# Altium PCB 题目一PCB.PcbDoc
Units mm, origin at the board's own origin, x right, y up, seen from the top; angles counter-clockwise.
Board outline 40 x 40 mm, 2 copper layers (Top Layer, Bottom Layer); 44 components, 8 nets, 104 pads, 0 vias.
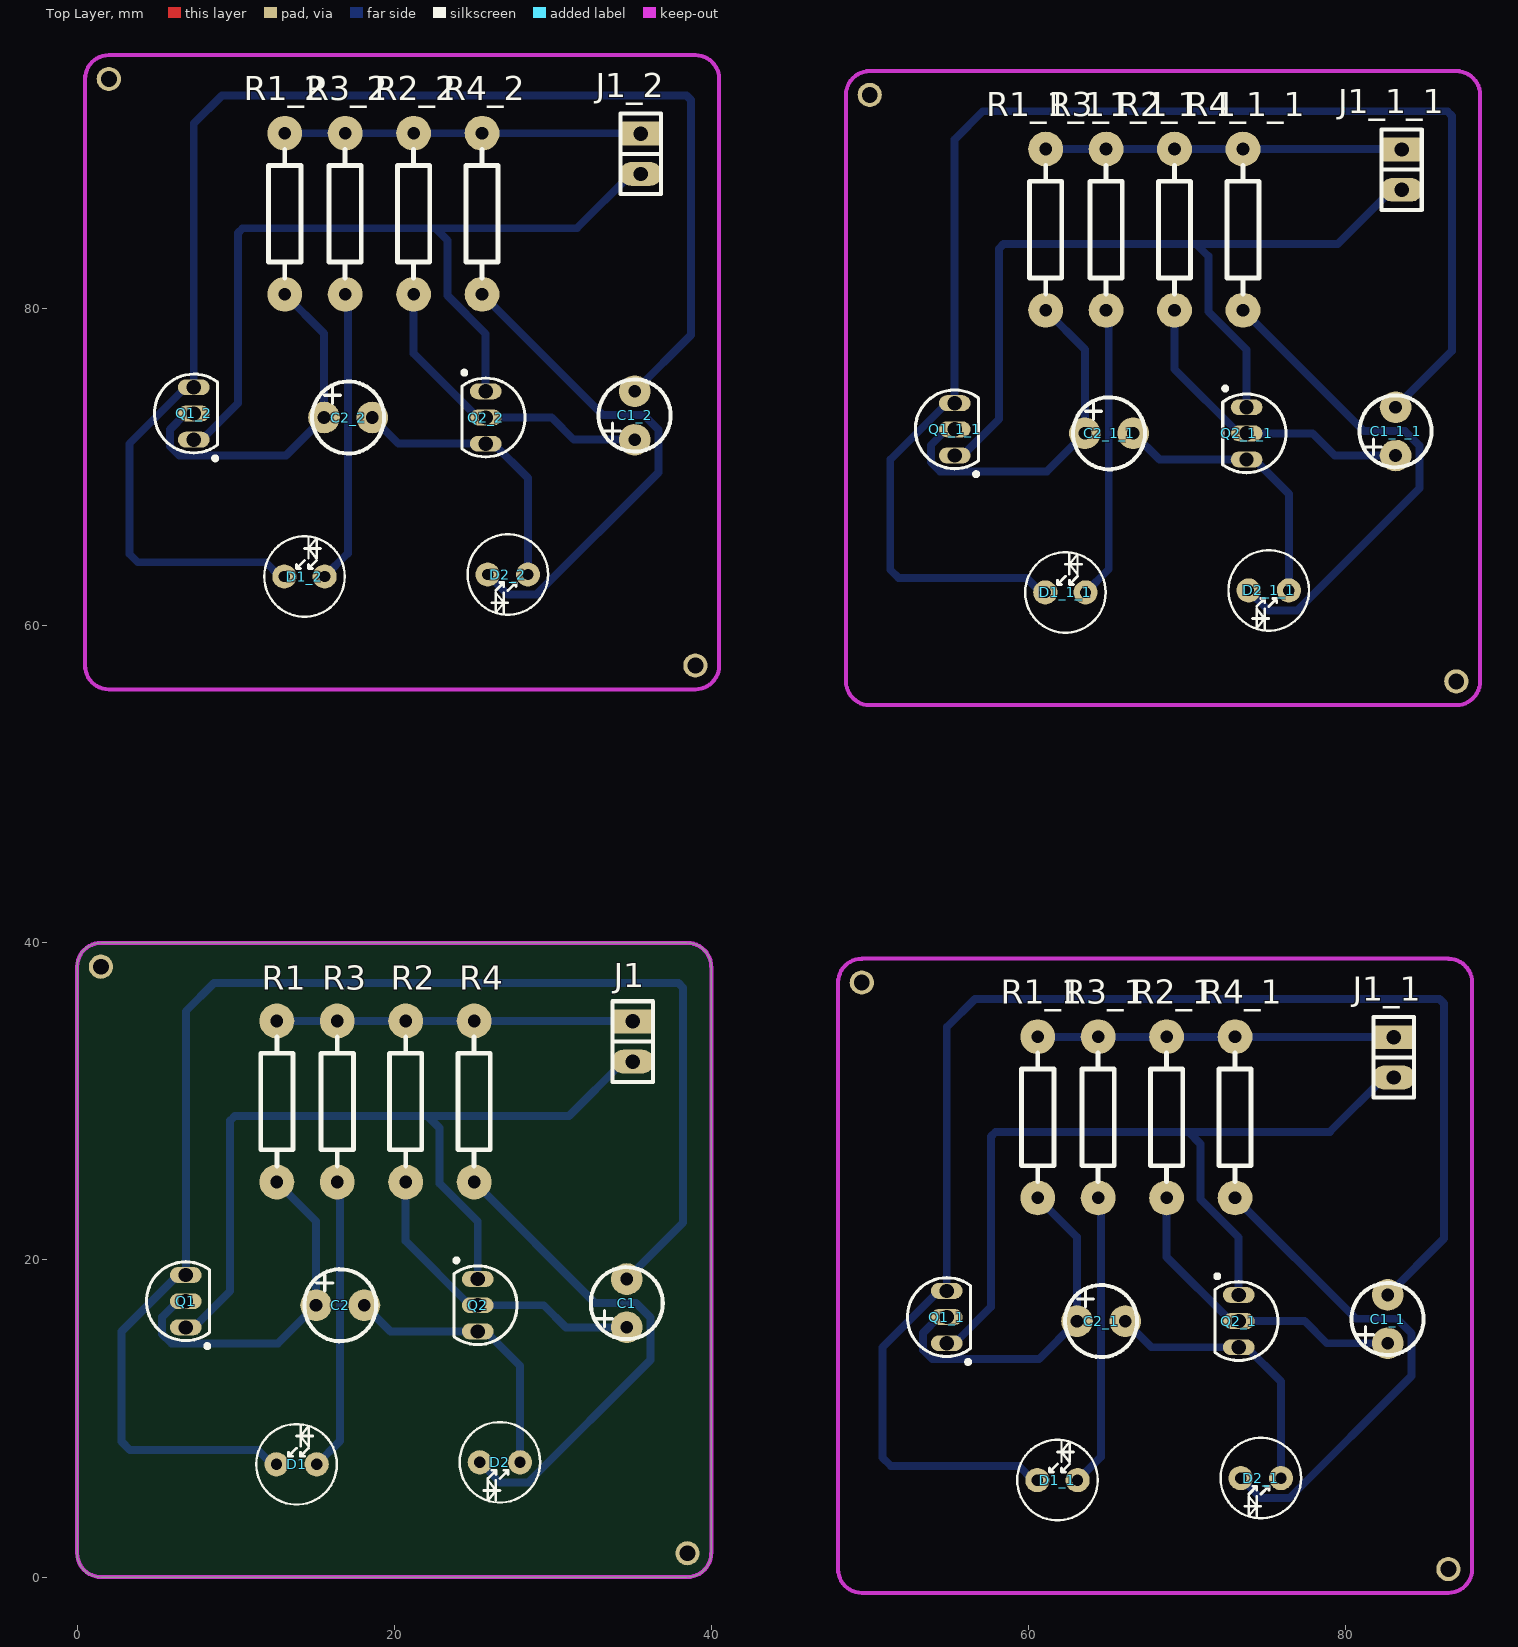
[diagram p0: Top Layer view]
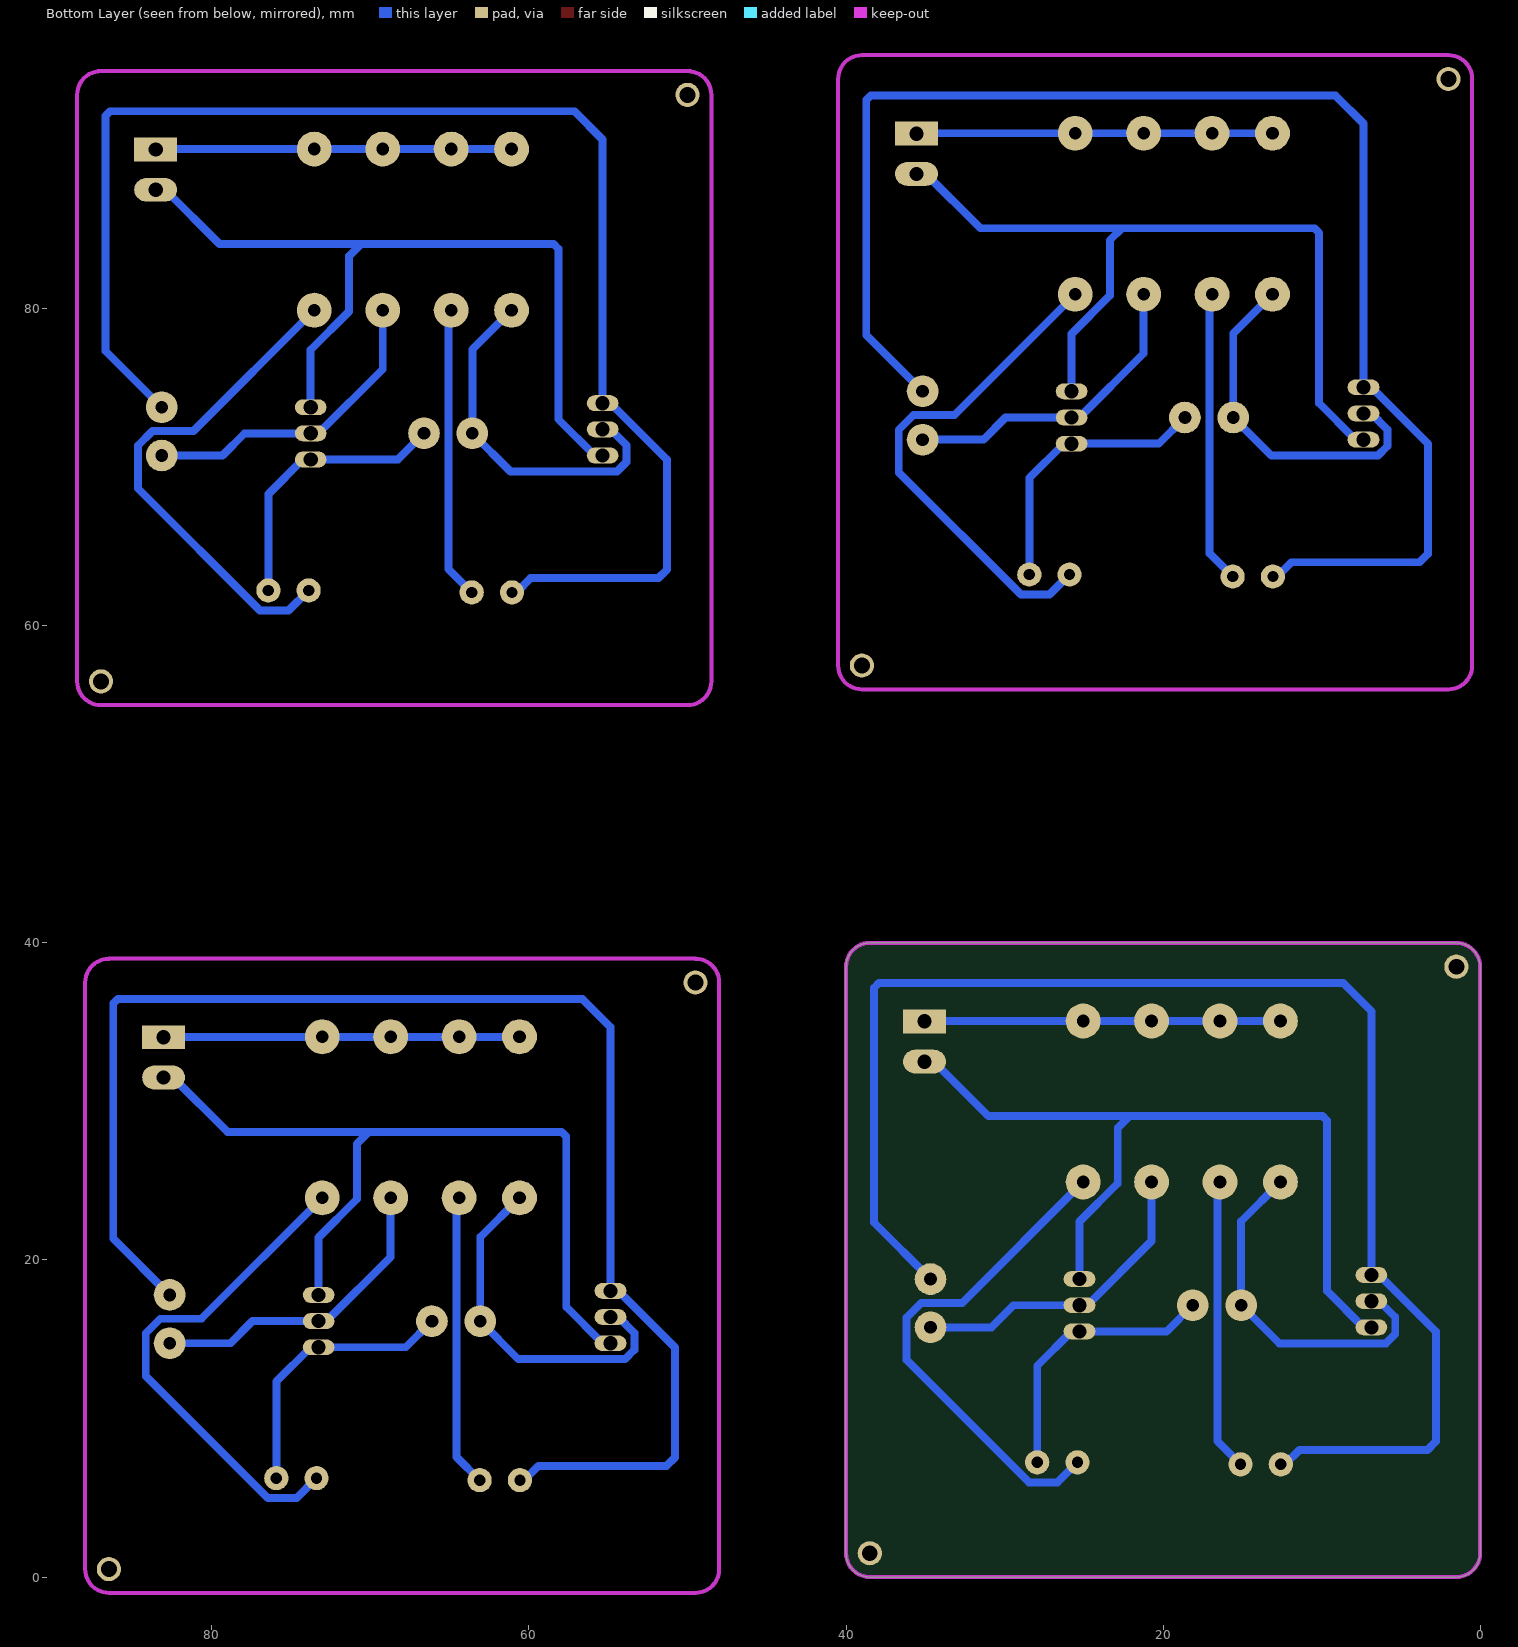
[diagram p1: Bottom Layer view, seen from below]

## Layer stack, top to bottom
Top Solder: solder mask 0.0102, Solder Resist, Dk 3.5
Top Layer: signal copper 0.0356
Dielectric 1: dielectric 0.32, FR-4, Dk 4.8
Bottom Layer: signal copper 0.0356
Bottom Solder: solder mask 0.0102, Solder Resist, Dk 3.5

## Board outline
0,1.5 ccw(c1.5,1.5) 1.5,0 38.5,0 ccw(c38.5,1.5) 40,1.5 40.005,1.505 40.005,38.495 40,38.5 ccw(c38.5,38.5) 38.5,40 38.495,40.005 1.5,40.005 1.5,40 ccw(c1.5,38.5) 0,38.5

## Design rules (kind name [scope] priority, off if disabled: settings)
Clearance [All] p1: gap=0.254 ignorepadtopadclearanceinfootprint=FALSE except(0: Arc-Hole Track-Hole SMDPad-Hole THPad-Hole Via-Hole Fill-Hole Poly-Hole Region-Hole Text-Hole)
PolygonConnect [All] p1: connectstyle=Relief reliefconductorwidth=0.254 reliefentries=4 polygonreliefangle="90 Angle" airgapwidth=0.254
RoutingVias [All] p1: holewidth=0.711 width=1.27 viastyle="Through Hole" minholewidth=0.711 minwidth=1.27 maxholewidth=0.711 maxwidth=1.27
SolderMaskExpansion [All] p1: expansion=0.102 istentingtop=FALSE
Width [All] p1: maxlimit=0.6 minlimit=0.4 preferedwidth=0.5 minimp=50.000000 maximp=50.000000 favimp=50.000000
30 further rules are at their usual default settings.

## Classes and differential pairs
component class 题目一原理图: C1 C2 D1 D2 J1 Q1 Q2 R1 R2 R3 R4

## Components (designator, comment, footprint, x,y, rotation, side; value= is the part's Value field where it differs from the comment)
C1 "22µF" CAP_1 34.671,17.272 r90 top
C1_1 "22µF" CAP_1 82.671,16.272 r90 top (schematic designator C1)
C1_1_1 "22µF" CAP_1 83.171,72.272 r90 top (schematic designator C1)
C1_2 "22µF" CAP_1 35.171,73.272 r90 top (schematic designator C1)
C2 "22µF" CAP_1 16.598,17.145 r0 top
C2_1 "22µF" CAP_1 64.598,16.145 r0 top (schematic designator C2)
C2_1_1 "22µF" CAP_1 65.098,72.145 r0 top (schematic designator C2)
C2_2 "22µF" CAP_1 17.098,73.145 r0 top (schematic designator C2)
D1 "LED" LED_5MM 13.843,7.112 r180 top value=BLUE
D1_1 "LED" LED_5MM 61.843,6.112 r180 top value=BLUE (schematic designator D1)
D1_1_1 "LED" LED_5MM 62.343,62.112 r180 top value=BLUE (schematic designator D1)
D1_2 "LED" LED_5MM 14.343,63.112 r180 top value=BLUE (schematic designator D1)
D2 "LED" LED_5MM 26.67,7.239 r0 top value=RED
D2_1 "LED" LED_5MM 74.67,6.239 r0 top value=RED (schematic designator D2)
D2_1_1 "LED" LED_5MM 75.17,62.239 r0 top value=RED (schematic designator D2)
D2_2 "LED" LED_5MM 27.17,63.239 r0 top value=RED (schematic designator D2)
J1 "CON1" sip-2 35.052,35.052 r270 top
J1_1 "CON1" sip-2 83.052,34.052 r270 top (schematic designator J1)
J1_1_1 "CON1" sip-2 83.552,90.052 r270 top (schematic designator J1)
J1_2 "CON1" sip-2 35.552,91.052 r270 top (schematic designator J1)
Q1 "S8050" TO-92 6.858,17.399 r90 top
Q1_1 "S8050" TO-92 54.858,16.399 r90 top (schematic designator Q1)
Q1_1_1 "S8050" TO-92 55.358,72.399 r90 top (schematic designator Q1)
Q1_2 "S8050" TO-92 7.358,73.399 r90 top (schematic designator Q1)
Q2 "S8050" TO-92 25.273,17.145 r270 top
Q2_1 "S8050" TO-92 73.273,16.145 r270 top (schematic designator Q2)
Q2_1_1 "S8050" TO-92 73.773,72.145 r270 top (schematic designator Q2)
Q2_2 "S8050" TO-92 25.773,73.145 r270 top (schematic designator Q2)
R1 "10KΩ" AXIAL0.4 12.446,30.48 r90 top
R1_1 "10KΩ" AXIAL0.4 60.446,29.48 r90 top (schematic designator R1)
R1_1_1 "10KΩ" AXIAL0.4 60.946,85.48 r90 top (schematic designator R1)
R1_2 "10KΩ" AXIAL0.4 12.946,86.48 r90 top (schematic designator R1)
R2 "10KΩ" AXIAL0.4 20.574,30.48 r90 top
R2_1 "10KΩ" AXIAL0.4 68.574,29.48 r90 top (schematic designator R2)
R2_1_1 "10KΩ" AXIAL0.4 69.074,85.48 r90 top (schematic designator R2)
R2_2 "10KΩ" AXIAL0.4 21.074,86.48 r90 top (schematic designator R2)
R3 "100Ω" AXIAL0.4 16.256,30.48 r90 top
R3_1 "100Ω" AXIAL0.4 64.256,29.48 r90 top (schematic designator R3)
R3_1_1 "100Ω" AXIAL0.4 64.756,85.48 r90 top (schematic designator R3)
R3_2 "100Ω" AXIAL0.4 16.756,86.48 r90 top (schematic designator R3)
R4 "100Ω" AXIAL0.4 24.892,30.48 r90 top
R4_1 "100Ω" AXIAL0.4 72.892,29.48 r90 top (schematic designator R4)
R4_1_1 "100Ω" AXIAL0.4 73.392,85.48 r90 top (schematic designator R4)
R4_2 "100Ω" AXIAL0.4 25.392,86.48 r90 top (schematic designator R4)

## Footprints (in the part's own frame and the unit in brackets; to place one, negate y for a bottom-side part, rotate by r counter-clockwise, add the part's x,y. Pads: shape width x height; smd on the part's side, far side on the other; paste and mask are expansions set on the pad)
AXIAL0.4 [mm]
  round 2.2 hole 0.8: 1(-5.563,-0.152) 2(4.597,-0.152)
  silkscreen extent -4.55,-1.17 3.58,0.86, body extent -5.81,-1.47 4.95,1.05, height 3.01
CAP_1 [mm]
  round 2 hole 0.8: 1(-1.524,0) 2(1.524,0)
  silkscreen extent -2.27,-2.27 2.27,2.27, body extent -2.02,-1.95 1.98,2.05, height 7.31
LED_5MM [mil]
  round 60 hole 28: 1(-50,0) 2(50,0)
  silkscreen extent -100,-100 100,100, body extent -100,-99 100,101, height 339
sip-2 [mm]
  rect 1.5x2.7 hole 0.9: 1(0,0)
  oval 1.5x2.7 hole 0.9: 2(2.54,0)
  silkscreen extent -1.27,-1.27 3.81,1.27
TO-92 [mm]
  oval 1x2 hole 0.9: 1(0,0) 2(-1.651,0) 3(1.651,0)
  silkscreen extent -2.95,-1.5 2.48,2.48, body extent -2.45,-1.68 2.35,2.32, height 8.09

## Part data
C1 C1_1 C1_1_1 C1_2 C2 C2_1 C2_1_1 C2_2: library part CAP+
J1 J1_1 J1_1_1 J1_2: library part CON2, "Connector"
Q1 Q1_1 Q1_1_1 Q1_2 Q2 Q2_1 Q2_1_1 Q2_2: "NPN", Manufacturer #2=8050, PCB DECAL=SOT-23
R1 R1_1 R1_1_1 R1_2 R2 R2_1 R2_1_1 R2_2 R3 R3_1 R3_1_1 R3_2 R4 R4_1 R4_1_1 R4_2: library part RES
D1 D1_1 D1_1_1 D1_2 D2 D2_1 D2_1_1 D2_2: PCB DECAL=LED_0603

## Free pads (board coordinates)
  round 1.524 hole 1 unplated: 5(1.5,38.5) 5(2,94.5) 5(49.5,37.5) 5(50,93.5) 6(38.5,1.5) 6(39,57.5) 6(86.5,0.5) 6(87,56.5)

## Nets (pads, with @x,y where several pads share a name; then routed paths per layer and width w, separated by ;. In a path a pad name is that pad's centre, name@x,y a point inside that pad or via, vN(x,y) a via of type N, cw(c..) or ccw(c..) an arc to the next point about the centre after c; other vN are vias at no path point)
+5: J1.1 R1.2 R2.2 R3.2 R4.2 | length 22.5
  Bottom Layer w0.5: R1.2 R3.2 R2.2 R4.2 35.027,35.077 J1.1
GND: J1.2 Q1.2 Q2.2 | length 53
  Bottom Layer w0.5: Q1.2 7.358,15.748 9.652,18.042 9.652,28.79 9.945,29.083 22.098,29.083 ; Q2.2 25.273,22.42 22.86,24.833 22.86,28.321 22.098,29.083 ; J1.2 34.452,32.512 31.023,29.083 22.098,29.083
NetC1_1: C1.1 Q2.1 R2.1 | length 19.9
  Bottom Layer w0.5: R2.1 20.726,21.192 24.773,17.145 29.436,17.145 30.833,15.748 C1.1
NetC1_2: C1.2 D1.2 Q1.3 | length 91.6
  Bottom Layer w0.5: D1.2 12.296,7.112 11.393,8.015 3.327,8.015 2.794,8.548 2.794,15.486 6.358,19.05 Q1.3 6.858,35.687 8.636,37.465 37.934,37.465 38.227,37.172 38.227,22.352 C1.2
NetC2_1: C2.1 Q1.1 R1.1 | length 22.9
  Bottom Layer w0.5: Q1.1@6.954,17.303 Q1.1 6.358,17.399 5.354,16.395 5.354,15.332 5.942,14.744 12.673,14.744 C2.1 15.074,22.441 R1.1
NetC2_2: C2.2 D2.2 Q2.3 | length 17.5
  Bottom Layer w0.5: C2.2 19.773,15.494 Q2.3 25.773,15.494 27.94,13.327 D2.2
NetD1_1: D1.1 R3.1 | length 18.5
  Bottom Layer w0.5: D1.1 16.578,8.577 16.578,24.747 R3.1
NetD2_1: D2.1 R4.1 | length 31.9
  Bottom Layer w0.5: R4.1 32.67,17.292 35.254,17.292 36.175,16.371 36.175,13.684 28.464,5.973 26.666,5.973 D2.1
pads on no net: C1_1.1 C1_1.2 C1_1_1.1 C1_1_1.2 C1_2.1 C1_2.2 C2_1.1 C2_1.2 C2_1_1.1 C2_1_1.2 C2_2.1 C2_2.2 D1_1.1 D1_1.2 D1_1_1.1 D1_1_1.2 D1_2.1 D1_2.2 D2_1.1 D2_1.2 D2_1_1.1 D2_1_1.2 D2_2.1 D2_2.2 J1_1.1 J1_1.2 J1_1_1.1 J1_1_1.2 J1_2.1 J1_2.2 Q1_1.1 Q1_1.2 Q1_1.3 Q1_1_1.1 Q1_1_1.2 Q1_1_1.3 Q1_2.1 Q1_2.2 Q1_2.3 Q2_1.1 Q2_1.2 Q2_1.3 Q2_1_1.1 Q2_1_1.2 Q2_1_1.3 Q2_2.1 Q2_2.2 Q2_2.3 R1_1.1 R1_1.2 R1_1_1.1 R1_1_1.2 R1_2.1 R1_2.2 R2_1.1 R2_1.2 R2_1_1.1 R2_1_1.2 R2_2.1 R2_2.2 R3_1.1 R3_1.2 R3_1_1.1 R3_1_1.2 R3_2.1 R3_2.2 R4_1.1 R4_1.2 R4_1_1.1 R4_1_1.2 R4_2.1 R4_2.2
copper on no net: | length 833.1
  Bottom Layer w0.5: 7.358,71.748 7.858,71.748 10.152,74.042 10.152,84.79 10.445,85.083 22.598,85.083 ; 7.454,73.303 7.358,73.399 6.858,73.399 5.854,72.395 5.854,71.332 6.442,70.744 13.173,70.744 15.574,73.145 15.574,78.441 13.098,80.917 ; 13.073,63.112 12.796,63.112 11.893,64.015 3.827,64.015 3.294,64.548 3.294,71.486 6.858,75.05 7.358,75.05 7.358,91.687 9.136,93.465 38.434,93.465 38.727,93.172 38.727,78.352 35.171,74.796 ; 13.098,91.077 16.908,91.077 21.226,91.077 25.544,91.077 35.527,91.077 35.552,91.052 ; 15.613,63.112 17.078,64.577 17.078,80.747 16.908,80.917 ; 18.622,73.145 20.273,71.494 25.773,71.494 26.273,71.494 28.44,69.327 28.44,63.239 ; 21.226,80.917 21.226,77.192 25.273,73.145 29.936,73.145 31.333,71.748 35.171,71.748 ; 25.544,80.917 33.17,73.292 35.754,73.292 36.675,72.371 36.675,69.684 28.964,61.973 27.166,61.973 25.9,63.239 ; 25.773,74.796 25.773,78.42 23.36,80.833 23.36,84.321 22.598,85.083 ; 35.552,88.512 34.952,88.512 31.523,85.083 22.598,85.083 ; 54.858,14.748 55.358,14.748 57.652,17.042 57.652,27.79 57.945,28.083 70.098,28.083 ; 54.954,16.303 54.858,16.399 54.358,16.399 53.354,15.395 53.354,14.332 53.942,13.744 60.673,13.744 63.074,16.145 63.074,21.441 60.598,23.917 ; 55.358,70.748 55.858,70.748 58.152,73.042 58.152,83.79 58.445,84.083 70.598,84.083 ; 55.454,72.303 55.358,72.399 54.858,72.399 53.854,71.395 53.854,70.332 54.442,69.744 61.173,69.744 63.574,72.145 63.574,77.441 61.098,79.917 ; 60.573,6.112 60.296,6.112 59.393,7.015 51.327,7.015 50.794,7.548 50.794,14.486 54.358,18.05 54.858,18.05 54.858,34.687 56.636,36.465 85.934,36.465 86.227,36.172 86.227,21.352 82.671,17.796 ; 60.598,34.077 64.408,34.077 68.726,34.077 73.044,34.077 83.027,34.077 83.052,34.052 ; 61.073,62.112 60.796,62.112 59.893,63.015 51.827,63.015 51.294,63.548 51.294,70.486 54.858,74.05 55.358,74.05 55.358,90.687 57.136,92.465 86.434,92.465 86.727,92.172 86.727,77.352 83.171,73.796 ; 61.098,90.077 64.908,90.077 69.226,90.077 73.544,90.077 83.527,90.077 83.552,90.052 ; 63.113,6.112 64.578,7.577 64.578,23.747 64.408,23.917 ; 63.613,62.112 65.078,63.577 65.078,79.747 64.908,79.917 ; 66.122,16.145 67.773,14.494 73.273,14.494 73.773,14.494 75.94,12.327 75.94,6.239 ; 66.622,72.145 68.273,70.494 73.773,70.494 74.273,70.494 76.44,68.327 76.44,62.239 ; 68.726,23.917 68.726,20.192 72.773,16.145 77.436,16.145 78.833,14.748 82.671,14.748 ; 69.226,79.917 69.226,76.192 73.273,72.145 77.936,72.145 79.333,70.748 83.171,70.748 ; 73.044,23.917 80.67,16.292 83.254,16.292 84.175,15.371 84.175,12.684 76.464,4.973 74.666,4.973 73.4,6.239 ; 73.273,17.796 73.273,21.42 70.86,23.833 70.86,27.321 70.098,28.083 ; 73.544,79.917 81.17,72.292 83.754,72.292 84.675,71.371 84.675,68.684 76.964,60.973 75.166,60.973 73.9,62.239 ; 73.773,73.796 73.773,77.42 71.36,79.833 71.36,83.321 70.598,84.083 ; 83.052,31.512 82.452,31.512 79.023,28.083 70.098,28.083 ; 83.552,87.512 82.952,87.512 79.523,84.083 70.598,84.083

## Keep-outs
Keep-Out Layer:
  lines w0.254: 1.5,40 ccw(c1.5,38.5) 0,38.5 0,38 0,1.5 ccw(c1.5,1.5) 1.5,0 38.5,0 ccw(c38.5,1.5) 40,1.5 ; 1.5,40.005 38.495,40.005 ; 2,96 ccw(c2,94.5) 0.5,94.5 0.5,94 0.5,57.5 ccw(c2,57.5) 2,56 39,56 ccw(c39,57.5) 40.5,57.5 ; 2,96.005 38.995,96.005 ; 38.5,40 cw(c38.5,38.5) 40,38.5 ; 39,96 cw(c39,94.5) 40.5,94.5 ; 40.005,1.505 40.005,38.495 ; 40.505,57.505 40.505,94.495 ; 49.5,39 ccw(c49.5,37.5) 48,37.5 48,37 48,0.5 ccw(c49.5,0.5) 49.5,-1 86.5,-1 ccw(c86.5,0.5) 88,0.5 ; 49.5,39.005 86.495,39.005 ; 50,95 ccw(c50,93.5) 48.5,93.5 48.5,93 48.5,56.5 ccw(c50,56.5) 50,55 87,55 ccw(c87,56.5) 88.5,56.5 ; 50,95.005 86.995,95.005 ; 86.5,39 cw(c86.5,37.5) 88,37.5 ; 87,95 cw(c87,93.5) 88.5,93.5 ; 88.005,0.505 88.005,37.495 ; 88.505,56.505 88.505,93.495

## Dimensions
0.5,94.5 to 40.5,94.5 on Mechanical 1
40.5,94.5 to 39,56 on Mechanical 1
88.5,93.5 to 87,55 on Mechanical 1
48.5,93.5 to 88.5,93.5 on Mechanical 1
48,37.5 to 88,37.5 on Mechanical 1
88,37.5 to 86.5,-1 on Mechanical 1
40,38.5 to 38.5,0 on Mechanical 1
0,38.5 to 40,38.5 on Mechanical 1